# Altium PCB BMSPowerDistribution.PcbDoc (part 2 of 6)
Units mil, origin at the board's own origin, x right, y up, seen from the top; angles counter-clockwise.
Board outline 5328.74 x 5315 mil, 4 copper layers (Top Layer, Layer 1, Layer 2, Bottom Layer), stack 24.6 mil thick; 321 components, 209 nets, 1075 pads, 489 vias.
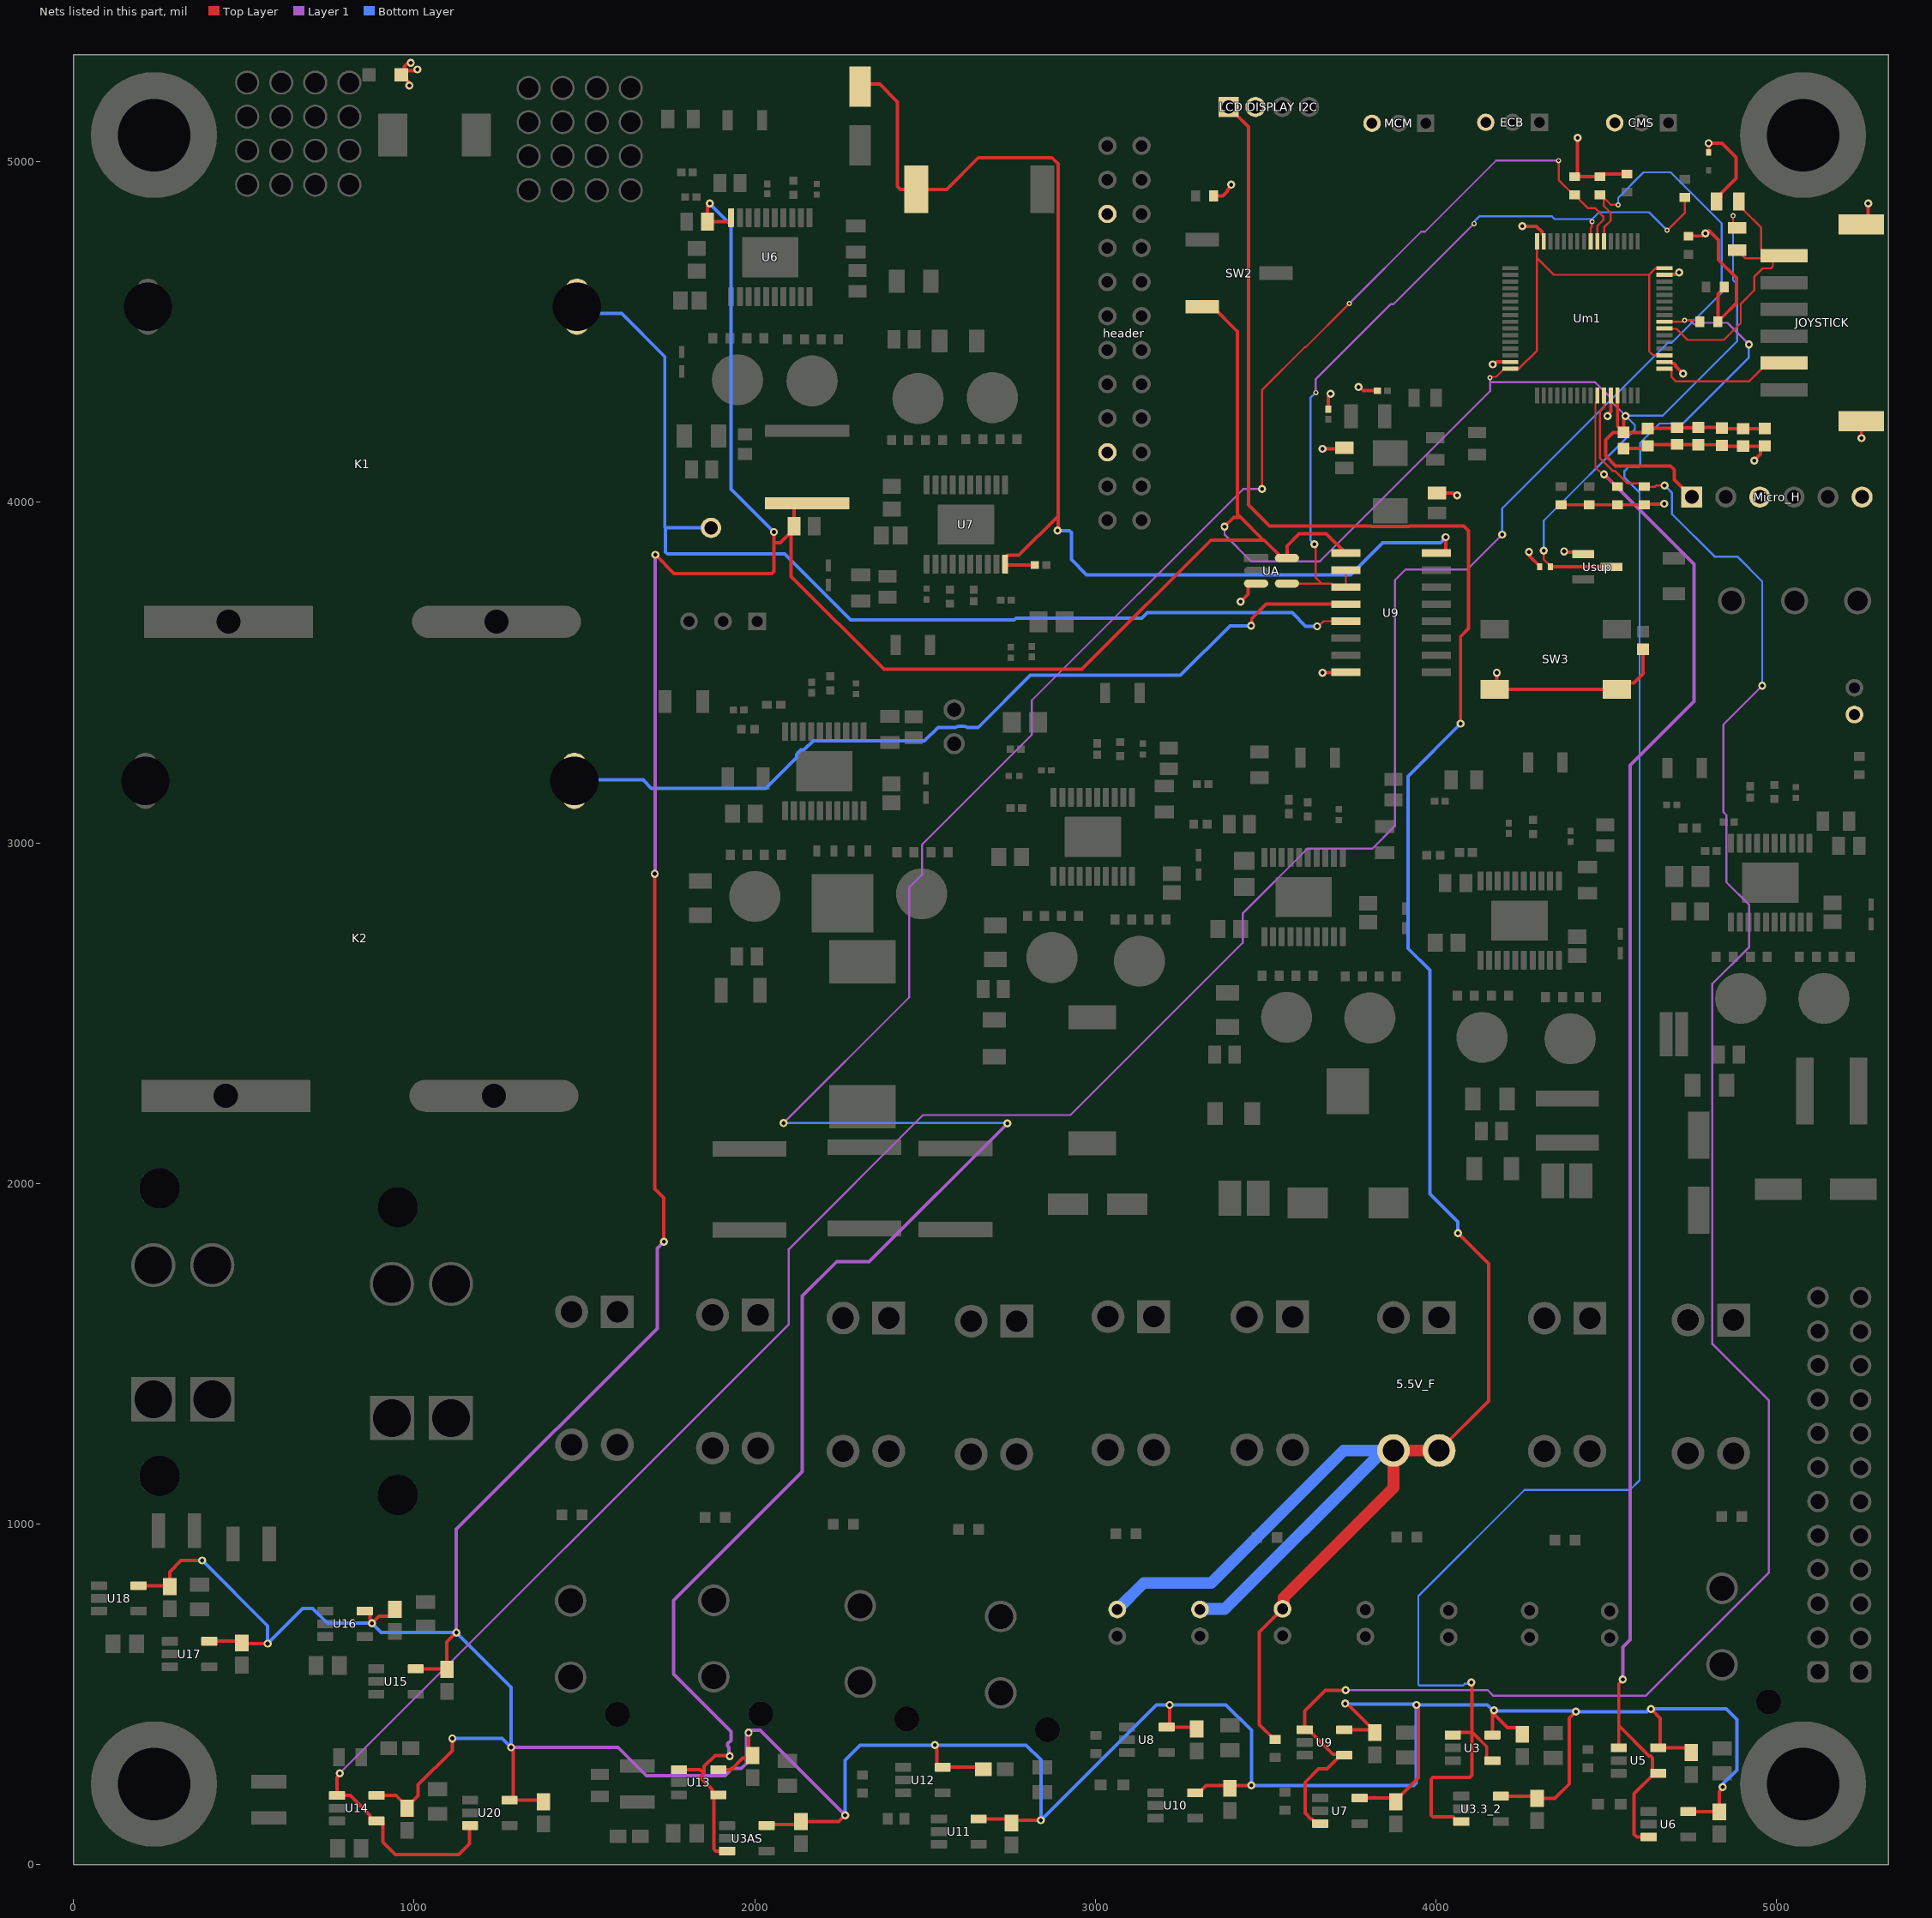
[diagram p4: the nets of this part, all layers, seen from the top]

## Part data (continued)
C17: library part CMP-1037-03888-2, "C1206 33,000 pF C0G 5.00% 100 V", Capacitance="33,000 pF", Manufacturer=KEMET, Package=C1206C-EB, Temperature="-55°C to +150°C", Temperature Characteristic=C0G, Temperature Coefficient=15%, Temperature Range High=+150°C, Temperature Range Low=-55°C, Tolerance=0.05, Voltage Rating="100 V", Automotive=Yes, Automotive Grade="Grade 0", Category=Cap, ComponentLink2Description=Datasheet, ComponentLink2URL=https://content.kemet.com/datasheets/KEM_C1007_X8R_ULTRA_150C_SMD.pdf, Device Class L1="Passive Components", Device Class L2=Capacitors, Device Class L3="Ceramic Capacitors", Height=0.88mm, Ipc Land Pattern Name=CAPC320160X78, Lead Free=Yes, Manufacturer Part Number=C1206C333J1GACTU, Material=Ceramic, Mouser Description="Cap Ceramic 0.033uF 100V C0G 5% Pad SMD 1206 125C T/R", Octopart=https://octopart.com/c1206c333j1gactu-kemet-47053096, RoHS=TRUE
C18 C21 C31 C67 C71 C75 C84 Cv Cv7: "No Description Available", Mfr_Name="Taiyo Yuden"
C19 C27 C66 Cc7: library part CMP-2008-04115-1, Manufacturer=Murata, Part Number=GRM1555C1E5R1CA01D
C20 C30 C68 C76 C85 Cb Cb71: library part CMP-2007-04739-1, Manufacturer="AVX Interconnect / Elco", Part Number=08053C104K4T2A
C22 C23 C24: library part CMP-08246-000988-1, "Cap Ceramic 47uF 16V X7R 20% Pad SMD 2220 +125°C Automotive T/R", Capacitance=47uF, Case Code (Imperial)=2220, Case Code (Metric)=5750, Dielectric=X7R, Max Operating Temperature=125°C, Min Operating Temperature=-55°C, Package Quantity=1, Ratings=AEC-Q200, Tolerance=20%, Voltage Rating=16V, Case/Package=2220, Composition=Ceramic, Depth=5mm, Height=2.3mm, Lead Free="Lead Free", Length=5.7mm, Mount="Surface Mount", Packaging="Tape and Reel", REACH SVHC="No SVHC", Termination=SMD/SMT, Thickness=0.091inch, Voltage Rating (DC)=16V, Weight=0.016932oz, Width=5mm
C25 C63 C74 Cc_6 Cr7: library part CMP-14477-003725-2, "None", Capacitance=270pF, Case Code (Imperial)=0402, Case Code (Metric)=1005, Dielectric=C0G, Max Operating Temperature=125°C, Min Operating Temperature=-55°C, Package Quantity=10000, Temperature Coefficient=30ppm/°C, Tolerance=5%, Voltage Rating=50V, Case/Package=0402, Construction=Flat, Depth=0.5mm, Halogen Free="Halogen Free", Height=0.5mm, Lead Free="Lead Free", Length=1mm, Mount="Surface Mount", Number of Pins=2, Packaging="Tape and Reel", Radiation Hardening=No, REACH SVHC="No SVHC", RoHS Compliant=Yes, Series=M, Termination=SMD/SMT, Thickness=0.022inch, Voltage Rating (DC)=50V, Width=0.02inch
C26 C64 C72 C81 Cs Cs7: "No Description Available", Mfr_Name=TDK
C28 C65 C80 Cc72 Cr: library part CMP-06035-063004-1, "CAP CER 100PF 50V C0G/NP0 0402", Capacitance=100pF, Case Code (Imperial)=0402, Case Code (Metric)=1005, Dielectric=C0G, Max Operating Temperature=125°C, Min Operating Temperature=-55°C, Package Quantity=10000, Temperature Coefficient=30ppm/°C, Tolerance=1%, Voltage=50V, Case/Package=0402, Construction=Flat, Depth=0.5mm, Height=0.5mm, Lead Free="Lead Free", Length=1mm, Material=Ceramic, Mount="Surface Mount", Packaging="Tape and Reel", RoHS Compliant=Yes, Series=GRM, Termination=SMD/SMT, Thickness=0.022inch, Voltage Rating=50V, Voltage Rating (DC)=50V, Width=0.5mm
C29: library part CMP-2100-03641-2, "CAP CER 0.1UF 16V X7R 0402", Capacitance=0.10μF, Manufacturer=Murata, Package=GRM15, Temperature="-55°C to +125°C", Temperature Characteristic=X7R, Temperature Range High=+125°C, Temperature Range Low=-55°C, Tolerance=10%, Voltage Rating=16Vdc, Category=Cap, ComponentLink2Description=Datasheet, ComponentLink2URL=https://search.murata.co.jp/Ceramy/image/img/A01X/G101/ENG/GRM155R71H471KA01-01A.pdf, Device Class L1="Passive Components", Device Class L2=Capacitors, Device Class L3="Ceramic Capacitors", Digikey Description="CAP CER 0.1UF 16V X7R 0402", Height=0.55mm, Ipc Land Pattern Name=CAPC10050X219, Lead Free=yes, Manufacturer Part Number=GRM155R71C104KA88D, Material=Ceramic, Mouser Description="0402 0.1 uF 16V ±10 % Tolerance X7R SMT Multilayer Ceramic Capacitor", Octopart=https://octopart.com/grm155r71c104ka88d-murata-196880, RoHS=TRUE, Standoff Height=0mm
C32 C33: library part CMP-2007-00302-2, "CAP CER 18PF 50V C0G/NP0 0805", Capacitance="18 pF", Manufacturer=KEMET, Package=C0805C-DN, Temperature="-55°C to +125°C", Temperature Characteristic=C0G, Temperature Coefficient=30ppm/°C, Temperature Range High=+125°C, Temperature Range Low=-55°C, Tolerance=0.05, Voltage Rating="50 V", Automotive=No, Category=Cap, ComponentLink2Description=Datasheet, ComponentLink2URL=https://content.kemet.com/datasheets/KEM_C1003_C0G_SMD.pdf, Device Class L1="Passive Components", Device Class L2=Capacitors, Device Class L3="Ceramic Capacitors", Digikey Description="CAP CER 18PF 50V C0G/NP0 0805", Height=0.88mm, Ipc Land Pattern Name=CAPC200125X78, Lead Free=Yes, Manufacturer Part Number=C0805C180J5GACTU, Material=Ceramic, Mouser Description="Cap Ceramic 18pF 50V C0G 5% SMD 0805 125C Paper T/R", Octopart=https://octopart.com/c0805c180j5gactu-kemet-144810, RoHS=TRUE
C34 C35: library part CMP-2008-03820-2, "Multi-Layer Ceramic Capacitor 1.5pF C0G  ±0.1pF 0402 Paper T/R", Capacitance=1.5pF, Case Code (Imperial)=0402, Case Code (Metric)=1005, Dielectric=C0G, Max Operating Temperature=125°C, Min Operating Temperature=-55°C, Package Quantity=10000, Temperature Coefficient=30ppm/°C, Voltage=50V, Case/Package=0402, Construction=Flat, Depth=0.5mm, Height=0.5mm, Lead Free="Lead Free", Lead Pitch=0.3mm, Length=1mm, Mount="Surface Mount", Number of Pins=2, Packaging="Tape and Reel", Radiation Hardening=No, REACH SVHC="No SVHC", Series=GJM, Termination=SMD/SMT, Thickness=0.022inch, Voltage Rating=50V, Voltage Rating (DC)=50V, Width=0.5mm
C40 Ct7: library part CMP-05428-001123-1, "Conductive Polymer Aluminum Solid Capacitors (OS-CON) 27uF ±20% 25V", Capacitance=27uF, Case/Package=Radial, ESR (Equivalent Series Resistance)=40mR, Leakage Current=135uA, Max Operating Temperature=105°C, Min Operating Temperature=-55°C, Package Quantity=1500, Ripple Current=2.45A, Tolerance=20%, Voltage=25V, Diameter=5mm, Dissipation Factor=12%, Height=5.9mm, Height - Seated (Max)=0.236inch, Length=5.9mm, Life (Hours)=5000Hour, Mount="Surface Mount", Number of Pins=6, Packaging="Tape and Reel", Polarity=Polar, REACH SVHC="No SVHC", Ripple Current (AC)=2.45A, RoHS Compliant=Yes, Series="OS-CON™, SVPF", Termination=SMD/SMT, Voltage Rating=25V, Voltage Rating (DC)=25V
C41 C42: library part CMP-05428-000019-2, "Conductive Polymer Aluminum Solid Capacitors (OS-CON) 22uF ±20% 35V", Capacitance=22uF, Case/Package=Radial, ESR (Equivalent Series Resistance)=35mR, Leakage Current=154uA, Max Operating Temperature=105°C, Min Operating Temperature=-55°C, Package Quantity=1000, Ripple Current=2.6A, Tolerance=20%, Voltage=35V, Diameter=6.3mm, Dissipation Factor=12%, Height=5.9mm, Height - Seated (Max)=0.236inch, Length=5.9mm, Life (Hours)=5000Hour, Mount="Surface Mount", Number of Pins=6, Packaging="Tape and Reel", Polarity=Polar, REACH SVHC="No SVHC", Ripple Current (AC)=2.6A, RoHS Compliant=Yes, Series="OS-CON™, SVPF", Termination=SMD/SMT, Voltage Rating=35V, Voltage Rating (DC)=35V
C51: library part CMP-2006-03713-1, Manufacturer=Kemet, Part Number=C0603C105K3RACTU
C53: library part CMP-2006-02836-2, "Chip Multilayer Ceramic Capacitors for General Purpose, 0603, 2.2uF, X7R, 15%, 10%, 10V", Capacitance=2.2uF, Case Code (Imperial)=0603, Case Code (Metric)=1608, Dielectric=X7R, Max Operating Temperature=125°C, Min Operating Temperature=-55°C, Package Quantity=1, Tolerance=10%, Voltage=10V, Case/Package=0603, Depth=0.8mm, Height=0.8mm, Lead Free="Lead Free", Length=1.6mm, Material=Ceramic, Mount="Surface Mount", Number of Pins=2, Packaging="Cut Tape", REACH SVHC="No SVHC", Termination=SMD/SMT, Thickness=0.035inch, Voltage Rating=10V, Voltage Rating (DC)=10V, Weight=7.1E-05oz, Width=0.031inch
C73 Cc6: library part CMP-1036-00838-4, "CAP CER 10PF 16V 20% NP0 0805", Capacitance="10 pF", Manufacturer=KEMET, Package=C0805C-DN, Temperature="-55°C to +125°C", Temperature Characteristic=C0G, Temperature Coefficient=30ppm/°C, Temperature Range High=+125°C, Temperature Range Low=-55°C, Tolerance=0.2, Voltage Rating="16 V", Automotive=No, Category=Cap, ComponentLink2Description=Datasheet, ComponentLink2URL=https://content.kemet.com/datasheets/KEM_C1003_C0G_SMD.pdf, Device Class L1="Passive Components", Device Class L2=Capacitors, Device Class L3="Ceramic Capacitors", Digikey Description="CAP CER 10PF 16V 20% NP0 0805", Height=0.88mm, Ipc Land Pattern Name=CAPC200125X78, Lead Free=Yes, Manufacturer Part Number=C0805C100M4GACTU, Material=Ceramic, Mouser Description="Multilayer Ceramic Capacitors MLCC - SMD/SMT 16volts 10pF C0G 20%", Octopart=https://octopart.com/c0805c100m4gactu-kemet-16430157, RoHS=TRUE
C77 C86: library part CMP-2000-06362-2, "CAP CER 47UF 16V X5R 1210", Capacitance=47uF, Case Code (Imperial)=1210, Case Code (Metric)=3225, Dielectric=X5R, Max Operating Temperature=85°C, Min Operating Temperature=-55°C, Package Quantity=1, Tolerance=10%, Voltage=16V, Case/Package=1210, Depth=2.5mm, Height=2.5mm, Lead Free="Lead Free", Length=3.2mm, Material=Ceramic, Mount="Surface Mount", Number of Pins=2, Packaging="Cut Tape", Radiation Hardening=No, REACH SVHC="No SVHC", RoHS Compliant=Yes, Termination=SMD/SMT, Thickness=0.106inch, Voltage Rating=16V, Voltage Rating (DC)=16V, Width=0.098inch
C82: library part CMP-2008-03987-1, Manufacturer=Murata, Part Number=GRM1555C1E120JA01D
C83: library part CMP-2008-04006-2, "Chip Multilayer Ceramic Capacitors for General Purpose, 0402, 390pF, C0G, 30ppm/°C, 5%, 50V", Capacitance=390pF, Case Code (Imperial)=0402, Case Code (Metric)=1005, Dielectric=C0G, Max Operating Temperature=125°C, Min Operating Temperature=-55°C, Package Quantity=1, Tolerance=5%, Voltage=50V, Case/Package=0402, Depth=0.5mm, Height=0.5mm, Length=1mm, Mount="Surface Mount", Packaging="Tape and Reel", Radiation Hardening=No, Termination=SMD/SMT, Thickness=0.022inch, Voltage Rating=50V, Voltage Rating (DC)=50V, Width=0.02inch
Cb1 Cb2 Cb3 Cb4 Cb5 Cb6 Cb7 Cb8 Cb9 Cb11 Cb12 Cb13 Cb14 Cb16 Cb17 Cb18 Cb19 Cbp Cbp2 Cbx: library part CMP-06035-047895-1, "Cap Ceramic 0.1uF 100V X7R 10% Pad SMD 0603 Soft Termination +125°C Automotive T/R", Capacitance=100nF, Case Code (Imperial)=0603, Case Code (Metric)=1608, Max Operating Temperature=125°C, Min Operating Temperature=-55°C, Ratings=AEC-Q200, Tolerance=10%, Voltage Rating=100V, Case/Package=0603, Features="Soft Termination", Lead Free="Lead Free", Length=0.063inch, Mount="Surface Mount", Packaging="Tape and Reel", Thickness=0.035inch, Width=0.031inch
CMS ECB MCM: library part CMP-2000-05164-1, "Male Header, Pitch 2 mm, 1 x 3 Position, Height 6 mm, Tail Length 3.4 mm, -25 to 85 degC, RoHS, Bulk", Manufacturer=JST, Datasheet URL=https://datasheet.ciiva.com/11746/0900766b80826550-11746939.pdf, Datasheet Version=Oct-06, Manufacturer URL=http://www.jst.com/home2.html, No of Positions=3, Pitch=2mm, Style/Orientation=StraightHeader/Plug, Termination=Crimp, Type=ShroudedHeader
Co_6: library part CMP-2007-01007-2, "CAP CER 4.7UF 10V X5R 0805", Capacitance=4.7uF, Case Code (Imperial)=0805, Case Code (Metric)=2012, Dielectric=X5R, Dielectric Material=Ceramic, Max Operating Temperature=85°C, Min Operating Temperature=-55°C, Package Quantity=1, Tolerance=10%, Voltage=10V, Case/Package=0805, Construction=Flat, Depth=1.25mm, Dissipation Factor=5%, Height=1.25mm, Lead Free="Lead Free", Lead Pitch=0.75mm, Length=2mm, Mount="Surface Mount", Number of Pins=2, Packaging="Tape and Reel", Radiation Hardening=No, REACH SVHC="No SVHC", RoHS Compliant=Yes, Series=C, Termination=SMD/SMT, Thickness=0.055inch, Voltage Rating=10V, Voltage Rating (DC)=10V, Width=1.2mm
CR15: "No Description Available", Mfr_Name="Diodes Inc"
D1 D2 D3 D4 D5 D6 D7: "No Description Available", Mfr_Name=Nexperia
D11: library part CMP-1051-00018-1, "Schottky Barrier Diode, 2-Pin SOD-523, Pb-Free, Tape and Reel", Manufacturer="On Semiconductor", ComponentLink1Description="Manufacturer URL", ComponentLink1URL=http://www.onsemi.com/, ComponentLink2Description=Datasheet, ComponentLink2URL=http://www.onsemi.cn/pub_link/Collateral/RB521S30T1-D.PDF, ComponentLink3Description="Package Specification", ComponentLink3URL=http://www.onsemi.com/pub_link/Collateral/502-01.PDF, Configuration=Single, DatasheetVersion="Rev. 8", IFSM Max (A)=1, Mounting Technology="Surface Mount", PackageDescription="2-Pin SOD, Body 1.2 x 0.8 mm", PackageReference=SOD-523-2-502-01, PackageVersion="Rev. E, 09/2010", Packing="Tape and Reel", PartNumber=RB521S30T1G, RoHS=TRUE
header J2: "No Description Available", Mfr_Name=Sullins, RefDes=RefDes, Type=Type
JOYSTICK: library part CMP-2000-07027-1, "Male Header, Pitch 2 mm, 1 x 6 Position, Height 5.5 mm, -25 to 85 degC", Manufacturer=JST, Package Description="Male Header, Pitch 2 mm, 1 x 6 Position, Height 5.5 mm", Datasheet URL=https://datasheet.ciiva.com/11747/0900766b80df0d9d-11747278.pdf, Datasheet Version=11/2008, Manufacturer URL=http://www.jst.com/home2.html, Mounting Technology=SurfaceMount, No of Positions=6, Package Reference=S6B-PH-SM4-TB(LF)(SN), Pitch=2mm, Style/Orientation=RightAngleHeader/Plug, Termination=Solder, Type=ShroudedHeader
JR: "No Description Available", Mfr_Name="Samtec Inc", RefDes=RefDes, Type=Type
K1 K2: library part CMP-00287-65278423-1, "HE1AN-W-DC12V-Y6 HE Series SPST 12 V 90 A PV Type Solar Inverter General Purpose Power Relay", Coil Current=160mA, Coil Power=1.92W, Coil Resistance=75Ω, Coil Voltage (DC)=12V, Contact Current Rating=90A, Max Operating Temperature=55°C, Min Operating Temperature=-50°C, Coil Type=Non-Latching, Contact Material=Silver, Current Rating=90A, Lead Free="Lead Free", Mount="PCB, Through Hole", NexarPartId=65278423, Number of Pins=4, Operate Time=30ms, Packaging=Bulk, Relay Type="General Purpose", Release Time=10ms, RoHS=Compliant, Termination="PC Pin", Throw Configuration=SPST
L1: "No Description Available", Mfr_Name=Vishay
L1_2 L1_3 L1_4 L1_7: "No Description Available", Mfr_Name=Coilcraft
L1_5: library part CMP-11268-000050-1, "Fixed Inductors 2.2uH 20% 9.7A 14.5mOhms", DC Resistance (DCR)=14.5mR, Inductance=2.2uH, Max DC Current=9.2A, Max Operating Temperature=125°C, Min Operating Temperature=-40°C, Package Quantity=20, Self Resonant Frequency=38MHz, Test Frequency=100kHz, Tolerance=20%, Core Material=Composite, Height=3.1mm, Lead Free="Contains Lead", Length=5.68mm, Packaging="Tape and Reel", Shielding=Shielded, Termination=SMD/SMT, Width=5.48mm
L6: library part CMP-0227-00379-3, Ambient Temperature Range High=95°C, Ambient Temperature Range Low=-40°C, Current Rating=1.05A, DC Resistance (DCR)=135mΩ, Inductance=27µH, Inductance Tolerance=30%, Max Operating Temperature=125°C, Self Resonant Frequency=15MHz, Height=2.8mm, Length=5.8mm, Min Operating Temperature=-40°C, NexarPartId=22803252, Number of Pins=2, Packaging="Cut Tape (CT)", RoHS=Compliant, Width=5.8mm
"LCD DISPLAY I2C": library part CMP-2000-05165-1, "Male Header, Pitch 2 mm, 1 x 4 Position, Height 6 mm, Tail Length 3.4 mm, -25 to 85 degC, RoHS, Bulk", Manufacturer=JST, Datasheet URL=http://datasheet.octopart.com/B4B-PH-K-S%28LF%29%28SN%29-JST-datasheet-10558886.pdf, Datasheet Version=Apr-09, Manufacturer URL=http://www.jst.com/home2.html, No of Positions=4, Pitch=2mm, Style/Orientation=StraightHeader/Plug, Termination=Crimp, Type=ShroudedHeader
M1 M1_2 M1_3 M1_4 M1_7 M2_7 Q3 Q5 Q6_1: library part CMP-04962-000050-1, "MOSFET N-CH 60V 50A 8SON", Continuous Drain Current (ID)=62A, Drain to Source Breakdown Voltage=60V, Drain to Source Resistance=13mR, Gate to Source Voltage (Vgs)=20V, Input Capacitance=1.48nF, Max Operating Temperature=150°C, Max Power Dissipation=3.2W, Min Operating Temperature=-55°C, Package Quantity=2500, Contact Plating=Copper, Drain to Source Voltage (Vdss)=60V, Element Configuration=Single, Fall Time=3.2ns, Lead Free="Contains Lead", Mount="Surface Mount", Nominal Vgs=3V, Number of Elements=1, Number of Pins=8, Packaging="Tape and Reel", Power Dissipation=3.2W, Radiation Hardening=No, Rds On Max=13mR, REACH SVHC="No SVHC", Rise Time=4ns, RoHS Compliant=Yes, Turn-Off Delay Time=14.4ns, Turn-On Delay Time=5.8ns
M2 U9 Usup: "No Description Available", Mfr_Name="Texas Instruments", RefDes=RefDes
  M2: Type=TYPE
  U9 Usup: Type=Type
Micro_H: library part CMP-04776-000763-1, "CONN HEADER VERT 6POS 2.54MM", Color=Black, Contact Resistance=20mR, Current Rating=4A, Max Operating Temperature=75°C, Max Voltage Rating (AC)=250V, Max Voltage Rating (DC)=250.25kV, Min Operating Temperature=0°C, Package Quantity=1, Connector Type="Male Pin", Contact Material=Brass, Contact Mating Length=0.24inch, Contact Plating=Tin, Contact Type="Male Pin", Depth=2.49mm, Gender=Male, Housing Color=Black, Housing Material=Thermoplastic, Length=15.24mm, Mount="Through Hole", Number of Contacts=6, Number of Positions=6, Number of Rows=1, Orientation=Straight, Packaging=Bulk, Pitch=2.54mm, RoHS Compliant=Yes, Series="KK® 42375", Termination=Solder, Voltage Rating=250V
MP1 MP2 MP3 MP4: library part CMP-03913-89311597-1, "9774050482R WA-SMSI SMT Steel Spacer, M4 Internal non Stop", Max Operating Temperature=150°C, Min Operating Temperature=-55°C, Length=5mm, Material=Steel, NexarPartId=89311597, Packaging="Tape and Reel", RoHS=Compliant, Width=8.2mm
MP7 MP8: library part CMP-69313-000006-1, "HEATSINK 14-DIP/16-DIP", Color=Black, Natural Thermal Resistance=67°C/W, Package Quantity=2000, Thermal Resistance @ Forced Air Flow (100 LFM)=30°C/W, Depth=19.05mm, Finish=Anodized, Height=4.826mm, Height Off Base=0.19inch, Lead Free="Lead Free", Length=0.75inch, Material=Aluminium, Mount=Adhesive, Number of Pins=14, Packaging=Bulk, REACH SVHC="No SVHC", RoHS Compliant=Yes, Shape=Fins, Type=Passive, Width=0.25inch
MP+ MP-: "7461147 REDCUBE Power Element Poles, 180A, Press-Fit, M5 Internal Thread, Vertical, WP-BUFU", Current Rating=180A, Max Operating Temperature=150°C, Min Operating Temperature=-55°C, Supplier Part Number 1=732-3215-ND, Contact Material=Copper, Contact Plating=Tin, Height=10.5mm, Insulation=Non-Insulated, Length=9mm, Material=Brass, Mount="Through Hole", NexarPartId=18187424, Number of Contacts=16, Number of Pins=16, Packaging=Bulk, REACH SVHC=Unknown, RoHS=Compliant, Supplier 1=Digikey, Termination=Press-Fit, Thread Size=M5, Width=9mm
"ON/OFF SW": "No Description Available", Mfr_Name=E-Switch, RefDes=RefDes, Type="Toggle Switches"
Q1 Q2 Q4 Q6 Q6_2: library part CMP-04962-000014-1, "MOSFET N-CH 60V 8SON", Continuous Drain Current=13A, Drain to Source Breakdown Voltage=60V, Drain to Source Resistance=7.8mΩ, Gate To Source Voltage=20V, Input Capacitace At Vds="1360pF @ 30V", Manufacturer="Texas Instruments", Max Forward Diode Voltage=1V, Max Junction Temp=+150°C, Package=DQJ0008A, Power Dissipation=3.1W, Pulse Drain Current=229A, Temperature="-55°C to +150°C", Temperature Range Low=-55°C, Typ Forward Diode Voltage=0.8V, Automotive=No, Category=Trans, ComponentLink2Description=Datasheet, ComponentLink2URL=http://www.ti.com/lit/ds/symlink/csd18534q5a.pdf, Depletion Mode=False, Device Class L1="Discrete Semiconductors", Device Class L2=Transistors, Device Class L3=MOSFETs, Digikey Description="MOSFET N-CH 60V 8SON", Drain To Source Voltage=60V, Gate Charge At Vgs="17nC @ 10V", Height=1.1mm, Lead Free=Yes, Manufacturer Part Number=CSD18534Q5A, Mouser Description="MOSFET 60V N-Ch NexFET Pwr MOSFET", Number Of Channels=1, Number Of N Channels=1, Octopart=https://octopart.com/csd18534q5a-texas+instruments-22791040, Reverse Recovery Charge=54nC, Reverse Recovery Time=40ns, RoHS=TRUE, Rthja Max=50°C/W, Temperature Range High=+150°C, Threshold Vgs Max=2.3V, Threshold Vgs Min=1.5V, Transconductance=72S, Turn Off Delay Time=15ns, Turn On Delay Time=5.2ns
R1 R16 R26 R46 R60 Re7 Ren: library part CMP-2002-08314-2, "RES Thick Film, 1MΩ, 1%, 0.063W, 100ppm/°C, 0402", Case Code (Imperial)=0402, Case Code (Metric)=1005, Max Operating Temperature=155°C, Max Power Dissipation=63mW, Min Operating Temperature=-55°C, Package Quantity=10, Resistance=1MR, Temperature Coefficient=100ppm/°C, Tolerance=1%, Voltage Rating=50V, Case/Package=0402, Composition="Thick Film", Contact Plating=Tin, Depth=0.5mm, Features="Automotive AEC-Q200", Height=0.35mm, Lead Free="Lead Free", Length=1mm, Military Standard=Not, Number of Pins=2, Number of Terminations=2, Packaging="Tape and Reel", Power Rating=63mW, Radiation Hardening=No, Termination=SMD/SMT, Voltage Rating (DC)=50V, Weight=2.3E-05oz, Width=0.02inch
R2 R12 R22 R42 R53 RU1 Ru7: library part CMP-2001-03906-2, Case Code (Imperial)=0805, Case Code (Metric)=2012, Manufacturer Package Identifier=CRCW0805-e3, Max Operating Temperature=155°C, Max Power Dissipation=125mW, Min Operating Temperature=-55°C, Resistance=41.2kΩ, Temperature Coefficient=100ppm/°C, Tolerance=1%, Voltage Rating=150V, Case/Package=0805, Composition="Thick Film", Contact Plating=Tin, Depth=1.25mm, Features="Automotive AEC-Q200", Height=500µm, Lead Free="Lead Free", Length=2mm, Military Standard=Not, NexarPartId=39846735, Number of Pins=2, Number of Terminations=2, Packaging="Cut Tape", Power Rating=125mW, Radiation Hardening=No, REACH SVHC=Unknown, RoHS=Compliant, Schedule B="8533210045, 8533210045", Termination=SMD/SMT, Voltage Rating (DC)=150V, Weight=5.499807mg, Width=1.2446mm
R3 R13 R23 R43 R54 RU2 Ruv7: library part CMP-2001-00072-1, Manufacturer=Panasonic, Part Number=ERJ-6ENF2491V
R4 R14 R24 R44 R55 Rt Rt7: library part CMP-2002-00118-4, "RES Thick Film, 5.23kΩ, 1%, 0.063W, 100ppm/°C, 0402", Case Code (Imperial)=0402, Case Code (Metric)=1005, Max Operating Temperature=155°C, Max Power Dissipation=63mW, Min Operating Temperature=-55°C, Package Quantity=10, Resistance=5.23kR, Temperature Coefficient=100ppm/°C, Tolerance=1%, Voltage Rating=50V, Case/Package=0402, Composition="Thick Film", Contact Plating=Tin, Depth=0.5mm, Features="Automotive AEC-Q200", Height=0.35mm, Lead Free="Lead Free", Length=1mm, Military Standard=Not, Number of Pins=2, Number of Terminations=2, Packaging="Tape and Reel", Power Rating=63mW, Radiation Hardening=No, Termination=SMD/SMT, Voltage Rating (DC)=50V, Weight=2.3E-05oz, Width=0.5mm, Working Voltage=50V
R5: library part CMP-1011-00737-2, Manufacturer="Vishay Dale", Part Number=CRCW0402102KFKED
R6 R49 R59 Rfb: "No Description Available", Mfr_Name="Stackpole International"
R7: library part CMP-2003-02282-2, "RES Thick Film, 56kΩ, 1%, 0.25W, 100ppm/°C, 1206", Case Code (Imperial)=1206, Case Code (Metric)=3216, Max Operating Temperature=155°C, Max Power Dissipation=250mW, Min Operating Temperature=-55°C, Package Quantity=10, Resistance=56kR, Temperature Coefficient=100ppm/°C, Tolerance=1%, Voltage Rating=200V, Case/Package=1206, Composition="Thick Film", Contact Plating=Tin, Depth=1.6mm, Features="Automotive AEC-Q200", Height=0.55mm, Lead Free="Lead Free", Length=3.2mm, Military Standard=Not, Number of Pins=2, Number of Terminations=2, Packaging="Tape and Reel", Power Rating=250mW, Radiation Hardening=No, Termination=SMD/SMT, Voltage Rating (DC)=200V, Weight=0.000353oz, Width=0.063inch
R8: "No Description Available", Mfr_Name="Bourns Electronics"
R9 R10 R20 R30 R31 R32 R33 R34 R35 R36 R37 R38 R40 R50 R52 RSW: library part CMP-2100-03664-2, "RES 10K OHM 1% 1/10W 0603", Case Code (Imperial)=0603, Case Code (Metric)=1608, Max Operating Temperature=155°C, Max Power Dissipation=100mW, Min Operating Temperature=-55°C, Resistance=10kR, Resistance Tolerance=1%, Resistor Type="Thick Film", Temperature Coefficient=100ppm/°C, Voltage Rating=75V, Voltage Rating (DC)=50V, Case/Package=0603, Construction=Rectangular, Depth=0.8mm, Features="Moisture Resistant", Height=0.45mm, Lead Free="Lead Free", Lead Pitch=0.3mm, Length=1.6mm, Military Standard=Not, Number of Pins=2, Number of Terminations=2, Packaging="Tape and Reel", Power Rating=100mW, RoHS Compliant=Yes, Series=RC, Size Code=0603, Termination=SMD/SMT, Tolerance=1%, Weight=7.1E-05oz, Width=0.8mm
R11: library part CMP-1012-00590-3, "RES Thick Film, 5.1kΩ, 1%, 0.1W, 100ppm/°C, 0603", Case Code (Imperial)=0603, Case Code (Metric)=1608, Max Operating Temperature=155°C, Min Operating Temperature=-55°C, Package Quantity=5000, Power Rating=100mW, Resistance=5.1kR, Temperature Coefficient=100ppm/°C, Tolerance=1%, Voltage Rating=75V, Case/Package=0603, Composition="Thick Film", Contact Plating=Tin, Depth=0.85mm, Height=0.45mm, Lead Free="Lead Free", Length=1.55mm, Military Standard=Not, Mount="Surface Mount", Packaging="Tape and Reel", Radiation Hardening=No, Termination=SMD/SMT, Voltage Rating (DC)=75V, Weight=7.1E-05oz, Width=0.85mm
R15 Rc7: library part CMP-2002-08268-4, "RES Thick Film, 191kΩ, 1%, 0.063W, 100ppm/°C, 0402", Case Code (Imperial)=0402, Case Code (Metric)=1005, Max Operating Temperature=155°C, Max Power Dissipation=63mW, Min Operating Temperature=-55°C, Package Quantity=10, Resistance=191kR, Temperature Coefficient=100ppm/°C, Tolerance=1%, Voltage Rating=50V, Case/Package=0402, Composition="Thick Film", Contact Plating=Tin, Depth=0.5mm, Features="Automotive AEC-Q200", Height=0.016inch, Lead Free="Lead Free", Length=1mm, Military Standard=Not, Number of Pins=2, Number of Terminations=2, Packaging="Tape and Reel", Power Rating=63mW, Radiation Hardening=No, Termination=SMD/SMT, Voltage Rating (DC)=50V, Weight=2.3E-05oz, Width=0.5mm
R17 Rs7: library part CMP-26527-006578-1, "General Purpose Thick Film Chip Resistor, 1206, 15mΩ, 1%, 0.5W", Case Code (Imperial)=1206, Case Code (Metric)=3216, Max Operating Temperature=155°C, Max Power Dissipation=500mW, Min Operating Temperature=-55°C, Resistance=15mR, Resistor Type="Thick Film", Temperature Coefficient=100ppm/°C, Tolerance=1%, Case/Package=1206, Contact Plating=Tin, Height=0.026inch, Lead Free="Lead Free", Length=0.12inch, Mount="Surface Mount", Number of Terminations=2, Packaging="Tape and Reel", Radiation Hardening=No, RoHS Compliant=Yes, Series=CSR, Width=0.061inch
R18 R28 Rf7: library part CMP-03412-015018-2, "RES 86.6kΩ ±1% 0.063W 0402", Case Code (Imperial)=0402, Case Code (Metric)=1005, Max Operating Temperature=155°C, Max Power Dissipation=63mW, Min Operating Temperature=-55°C, Power Rating=62.5mW, Resistance=86.6kR, Resistor Type="Thick Film", Temperature Coefficient=100ppm/°C, Tolerance=1%, Voltage Rating=50V, Case/Package=0402, Features="Moisture Resistant", Height=0.015inch, Length=0.039inch, Number of Terminations=2, Packaging="Tape and Reel", RoHS Compliant=Yes, Series=AC, Termination=SMD/SMT, Weight=2.3E-05oz, Width=0.5mm
R19 R29 Rb7: library part CMP-1013-00622-2, Manufacturer=Panasonic, Part Number=ERJ-6ENF9761V
R21 R41: library part CMP-1012-00567-3, Case Code (Imperial)=0603, Max Operating Temperature=155°C, Max Power Dissipation=100mW, Min Operating Temperature=-55°C, Resistance=3.3kΩ, Temperature Coefficient=100ppm/°C, Tolerance=1%, Voltage Rating=50V, Case Code (Metric)=0603, Case/Package=0603, Composition="Thick Film", Depth=800µm, Features="Moisture Resistant", Height=450µm, Lead Free="Lead Free", Length=1.6mm, Military Standard=Not, Mount="Surface Mount", NexarPartId=40011875, Number of Pins=2, Number of Terminations=2, Packaging="Tape & Reel", Power Rating=100mW, REACH SVHC="No SVHC", RoHS=Compliant, Schedule B="8533210045, 8533210045", Termination=SMD/SMT, Voltage Rating (AC)=50V, Voltage Rating (DC)=50V, Width=800µm
R25: library part CMP-2002-08203-2, "RES Thick Film, 143kΩ, 1%, 0.063W, 100ppm/°C, 0402", Case Code (Imperial)=0402, Case Code (Metric)=1005, Max Operating Temperature=155°C, Min Operating Temperature=-55°C, Package Quantity=10000, Power Rating=63mW, Resistance=143kR, Temperature Coefficient=100ppm/°C, Tolerance=1%, Voltage Rating=50V, Case/Package=0402, Composition="Thick Film", Contact Plating=Tin, Depth=0.5mm, Height=0.35mm, Lead Free="Lead Free", Length=1mm, Military Standard=Not, Number of Pins=2, Packaging="Tape and Reel", Radiation Hardening=No, Termination=SMD/SMT, Voltage Rating (DC)=50V, Weight=2.3E-05oz, Width=0.5mm
R27: library part CMP-2003-04760-2, "7 mOhms ±1% 1W Chip Resistor Wide 0612 (1632 Metric), Current Sense Thin Film", Case Code (Imperial)=1206, Case Code (Metric)=3216, Max Operating Temperature=125°C, Max Power Dissipation=1W, Min Operating Temperature=-55°C, Package Quantity=1, Resistance=7mR, Resistor Type="Thin Film", Temperature Coefficient=350ppm/°C, Tolerance=1%, Case/Package=1206, Height=0.024inch, Lead Free="Lead Free", Length=0.063inch, Number of Terminations=2, Packaging="Tape and Reel", Power Rating=1W, RoHS Compliant=Yes, Series=PRL, Technology="THIN FILM", Termination=SMD/SMT, Width=0.126inch
R45: library part CMP-2002-00162-1, Manufacturer="Vishay Dale", Part Number=CRCW040266K5FKED
R47 R57: library part CMP-26527-002803-1, "General Purpose Thick Film Chip Resistor, 1206, 12mΩ, 1%, 0.5W", Case Code (Imperial)=1206, Case Code (Metric)=3216, Max Operating Temperature=155°C, Max Power Dissipation=500mW, Min Operating Temperature=-55°C, Resistance=12mR, Resistor Type="Thick Film", Temperature Coefficient=100ppm/°C, Tolerance=1%, Case/Package=1206, Construction=Rectangular, Contact Plating=Tin, Depth=1.55mm, Height=0.026inch, Lead Free="Lead Free", Length=0.12inch, Military Standard=Not, Mount="Surface Mount", Number of Terminations=2, Packaging="Tape and Reel", RoHS Compliant=Yes, Series=CSR, Width=0.061inch
R48: library part CMP-2001-00129-1, Manufacturer=Panasonic, Part Number=ERJ-6ENF3242V
R51: library part CMP-2000-06932-2, "RES 20K OHM 1% 1/10W 0603", Case Code (Imperial)=0603, Case Code (Metric)=1608, Max Operating Temperature=155°C, Max Power Dissipation=100mW, Min Operating Temperature=-55°C, Package Quantity=1, Resistance=20kR, Resistance Tolerance=1%, Resistor Type="Thick Film", Temperature Coefficient=100ppm/°C, Voltage Rating=50V, Case/Package=0603, Construction=Rectangular, Depth=0.8mm, Features="Moisture Resistant", Height=0.022inch, Lead Free="Lead Free", Length=0.063inch, Military Standard=Not, Number of Pins=2, Number of Terminations=2, Packaging="Tape and Reel", Power Rating=100mW, REACH SVHC="No SVHC", RoHS Compliant=Yes, Series=RC, Size Code=0603, Technology="THICK FILM", Termination=SMD/SMT, Tolerance=1%, Voltage Rating (DC)=50V, Width=0.031inch
R56: library part CMP-2002-00027-1, Manufacturer="Vishay Dale", Part Number=CRCW040247K5FKED
R58 Rf: library part CMP-2001-00015-1, Manufacturer=Panasonic, Part Number=ERJ-6ENF1872V
RAS RAS3 RM RM3: library part CMP-2005-01988-2, "RES SMD 205K OHM 1% 1/2W 1770", Case Code (Imperial)=1210, Case Code (Metric)=3225, Max Operating Temperature=155°C, Max Power Dissipation=500mW, Min Operating Temperature=-55°C, Package Quantity=1, Resistance=100kR, Temperature Coefficient=100ppm/°C, Tolerance=1%, Voltage Rating=200V, Case/Package=1210, Composition="Thick Film", Contact Plating=Tin, Depth=2.5mm, Features="Automotive AEC-Q200", Height=0.024inch, Lead Free="Lead Free", Length=3.2mm, Military Standard=Not, Mount="Surface Mount", Number of Pins=2, Number of Terminations=2, Packaging="Tape and Reel", Power Rating=500mW, Radiation Hardening=No, Termination=SMD/SMT, Voltage Rating (DC)=200V, Weight=0.000564oz, Width=2.5mm
RAS2 RAS4 RM2 RM4: library part CMP-2001-04472-1, Manufacturer="Vishay Dale", Part Number=CRCW080510K0FKEAHP
Rc: library part CMP-2002-07773-1, Manufacturer="Yageo / Phycomp", Part Number=RC0402FR-0768K1L
RJ1 RJ2 RJ3 RJ4 RJ5 RJ6 RJ7: library part CMP-2001-04896-1, Manufacturer="Vishay Dale", Part Number=CRCW08050000Z0EA
RL: library part CMP-2003-04857-2, "RES Thick Film, 0Ω, 0.25W, 1206", Case Code (Imperial)=1206, Case Code (Metric)=3216, Max Operating Temperature=155°C, Min Operating Temperature=-55°C, Package Quantity=5000, Power Rating=250mW, Resistance=0mR, Temperature Coefficient=100ppm/°C, Tolerance=1%, Voltage Rating=200V, Case/Package=1206, Composition="Thick Film", Contact Plating=Tin, Depth=1.6mm, Height=0.55mm, Lead Free="Lead Free", Length=3.2mm, Military Standard=Not, Mount="Surface Mount", Packaging="Tape and Reel", Radiation Hardening=No, Termination=SMD/SMT, Voltage Rating (DC)=200V, Weight=0.000353oz, Width=1.6mm
RL1 RL2 RL3 RL4 RL5 RL6 RL7 RL8 RL9: library part CMP-2001-04104-1, Manufacturer="Vishay Dale", Part Number=CRCW0805750RFKEA
Rs: library part CMP-2000-00864-1, Manufacturer=Panasonic, Part Number=ERJ-3RSFR15V
SW2: library part CMP-10038-000023-1, "SWITCH SLIDE SPDT 300MA 6V", Actuator Color=Black, Case/Package=SMD/SMT, Contact Resistance=70mR, Current Rating=300mA, Max Operating Temperature=85°C, Max Voltage Rating (DC)=30V, Min Operating Temperature=-40°C, Package Quantity=4000, Voltage Rating (DC)=6V, Actuator Length=2mm, Actuator Material=Nylon, Actuator Type=Standard, Contact Material="Copper Alloy", Contact Plating=Silver, Depth=7.5mm, Electrical Life=5000Cycles, Housing Material=Nylon, Length=8.5mm, Max Current Rating=300mA, Mount="Surface Mount", Orientation=Straight, Packaging="Tape and Reel", Radiation Hardening=No, RoHS Compliant=Yes, Series=JS, Switch Function=On-On, Switch Travel=2mm, Termination="Gull Wing", Throw Configuration=SPDT
SW3: library part CMP-2000-05602-2, "Swicth, SPST, 24 V, -35 to 85 degC, 4-Pin SMD, RoHS, Tape and Reel", Case\/Package=SMD/SMT, Contact Current Rating=50mA, Contact Resistance=100mOhm, Manufacturer="TE Connectivity", Max Operating Temperature=85degC, Max Voltage Rating (DC)=12V, Min Operating Temperature=-35degC, Operating Force=1.57N, Package Description="4-Pin Surface Mount Device, Body 6 x 6 mm, Pitch 4.5 mm", Package Quantity=750, Voltage Rating=24V, Actuator Length=0.055inch, Actuator Material=Polyamide, Contact Material=CopperAlloy, Contact Plating=Silver, Current Rating=50mA, Datasheet URL=http://www.te.com/commerce/DocumentDelivery/DDEController?Action=showdoc&DocId=Customer+Drawing%7F2-1437565-7%7FV%7Fpdf%7FEnglish%7FENG_CD_2-1437565-7_V.pdf%7F4-1437565-2, Datasheet Version="Rev. V, 02/2015", Electrical Life=100000Cycles, Illumination Type=Illuminated, Length=6mm, Manufacturer URL=http://www.te.com/, Mechanical Life=100000Cycles, Mount=SurfaceMount, Mounting Technology=SurfaceMount, Orientation=Straight, Package Reference=FSM4JSMA, Packaging=LoosePiece, REACH SVHC=Unknown, RoHSCompliant=true, Switch Travel=0.25mm, Termination=GullWing, Throw Configuration=SPST, Voltage Rating (DC)=24V, Width=6mm
U1 U2 U3 U4 U5 U6 U7: library part CMP-0069-01417-3, "Wide Range Synchronous Buck Controller, 20-pin TSSOP-EP, Pb-Free", Manufacturer="Texas Instruments", PackageTopMarking=NSUZXYTT*LM25116*MH, PowerWise=Y, Code_JEDEC=MO-153-ACT, ComponentLink1Description="Datasheet URL", ComponentLink1URL=http://www.ti.com/general/docs/lit/getliterature.tsp?genericPartNumber=LM25116&fileType=pdf, CompType=Switcher, PackageDescription="Molded TSSOP, Jedec, 6.5 x 4.4 x 0.9mm Body, 20 Lead, 0.65mm Pitch, Exposed Pad", PackageReference=PWP0020A, PinCount=20, RoHS=Y
U3 U3.3_2 U3AS U5 U6 U7 U8 U9 U10 U11 U12 U13 U14 U15 U16 U17 U18 U20: library part CMP-0272-02192-3, "550 uA/Ch, 3 MHz, Rail-to-Rail Output Operational Amplifier, 2.7 to 16 V, -40 to 125 degC, 5-pin SOT23 (DBV5), Green (RoHS & no Sb/Br)", Manufacturer="Texas Instruments", Rating=Catalog, Total Supply Voltage(Max)(+5V is 5, +/-5V is 10)=16, Total Supply Voltage(Min)(+5V is 5, +/-5V is 10)=2.7, CMRR(Min)(dB)=69, Code_JEDEC=MO-178, ComponentLink1Description="Manufacturer URL", ComponentLink1URL=http://www.ti.com/, ComponentLink2Description=Datasheet, ComponentLink2URL=http://www.ti.com/lit/ds/symlink/tlv271.pdf, ComponentLink3Description="Package Specification", ComponentLink3URL=http://www.ti.com/litv/pdf/mpds018i, DatasheetVersion=SLOS351D, Eco-Plan="Green (RoHS & no Sb/Br)", GBW(Typ)(MHz)=3, IIB(Max)(pA)=60, Iq per channel(Max)(mA)=0.66, Mounting Technology="Surface Mount", Number Of Channels=1, Offset Drift(Typ)(uV/C)=2, PackageDescription="5-Pin Plastic Small Outline, Body 1.6 x 2.9 mm, Pitch 0.95 mm", PackageReference=DBV0005A, PackageVersion="4073253-4/K, 03/2006", Packing="LARGE T&R", PartNumber=TLV271IDBVR, Slew Rate(Typ)(V/us)=2.4, Sub Family="Low Supply Voltage Amplifier (<=2.7V), Precision Amplifier", Vio (25C)(Max)(mV)=5
UA: library part CMP-04903-000072-1, "IC GATE AND 1CH 2-INP SOT23-5", Case/Package=SOT-23-5, High Level Output Current=-32mA, Low Level Output Current=32mA, Max Operating Temperature=125°C, Max Supply Voltage=5.5V, Min Operating Temperature=-40°C, Min Supply Voltage=1.65V, Package Quantity=3000, Quiescent Current=10uA, Lead Free="Lead Free", Logic Function="AND GATE", Mount="Surface Mount", Number of Bits=1, Number of Circuits=1, Number of Elements=1, Number of Gates=1, Number of Input Lines=2, Number of Inputs=2, Number of Output Lines=1, Number of Outputs=1, Number of Pins=5, Output Current=32mA, Packaging="Tape and Reel", Propagation Delay=4ns, Radiation Hardening=No, REACH SVHC="No SVHC", RoHS Compliant=Yes, Series=74LVC, Technology=CMOS, Weight=0.000557oz
Um1: "No Description Available", Mfr_Name=STMicroelectronics, RefDes=RefDes, Type=Type
Y1: library part CMP-27762-010820-1, "Crystal 25MHz ±20ppm 18pF SMD-2 6mm x 3.5mm", Case/Package=CSMD, ESR (Equivalent Series Resistance)=50R, Frequency=25MHz, Frequency Stability=30ppm, Frequency Tolerance=20ppm, Load Capacitance=18pF, Max Operating Temperature=85°C, Min Operating Temperature=-40°C, Operating Frequency="25 MHz", Package Quantity=1000, Resistor Type=Ceramic, Depth=3.5mm, Height=0.055inch, Lead Free="Lead Free", Length=6mm, Mount="Surface Mount", Number of Pins=2, Packaging="Tape and Reel", Radiation Hardening=No, REACH SVHC=Yes, Series=ABM7, Series Resistance=50R, Termination=SMD/SMT, Tolerance=20ppm, Width=3.3mm
Y2: library part CMP-00536-143767433-1, "MU00525-32.768K Crystal 32.7680KHZ 6PF SMD", NexarPartId=143767433

## Via types
v1: diameter 23.62, hole 11.81, Top Layer to Bottom Layer, 370 vias
v2: diameter 19.68, hole 7.87, Top Layer to Bottom Layer, 84 vias
v3: diameter 15, hole 8, Top Layer to Bottom Layer, 35 vias

## Nets (pads, with @x,y where several pads share a name; then routed paths per layer and width w, separated by ;. In a path a pad name is that pad's centre, name@x,y a point inside that pad or via, vN(x,y) a via of type N, cw(c..) or ccw(c..) an arc to the next point about the centre after c; other vN are vias at no path point)
3.3+: C1.2 C2.2 C3.2 C4.2 C13.1 C29.1 C51.2 C52.1 Cb1.1 Cb2.1 Cb3.1 Cb4.1 Cb5.1 Cb6.1 Cb7.1 Cb8.1 Cb9.1 Cb11.1 Cb12.1 Cb13.1 Cb14.1 Cb16.1 Cb17.1 Cb18.1 Cb19.1 Cbx.1 Co_6.1 L6.2 Micro_H.1 Rf.2 RJ2.1 SW2.3 U3.3_2.5 U3.5@4166.34,379.92 U3AS.5 U5.5@4653.54,342.52 U6.5@4741.14,155.51 U6.10 U7.5@3776.57,194.88 U8.5 U9.1@3735.97,3851.18 U9.5@3731.3,395.67 U10.5 U11.5 U12.5 U13.5 U14.5 U15.5 U16.5 U17.5 U18.5 U20.5 UA.5 Um1.13 Um1.19 Um1.32 Um1.48 Um1.64 Usup.3 | length 24536.3
  Top Layer w6: v3(4159.45,4366.14) 4162.06,4368.75 4177.16,4368.75 4200.15,4391.74 4217.65,4391.74 Um1.64@4218.65,4392.74 4219.65,4393.74 4245.11,4393.74 4297.39,4446.02 4297.39,4718 ; Um1.48@4297.39,4766.76 4297.39,4718 ; v1(4316.93,3858.27) 4316.93,3832.68 4333.74,3815.87 4333.74,3813.9 C29.1@4336.61,3811.02 ; Um1.19@4671.41,4432.11 4670.41,4433.11 4637.31,4433.11 4626.56,4443.86 4626.56,4668.63 ; Um1.32@4671.41,4688.02 4670.41,4687.02 4644.95,4687.02 4626.56,4668.63 ; v3(4873.03,4841.83) 4873.03,4819.83 4880.99,4811.87 RJ2.1@4881.56,4811.87 ; 4297.39,4718 4346.77,4668.63 4626.56,4668.63
  Top Layer w10: U18.5@190.94,818.9 279.57,818.9 Cb3.1@282.48,815.98 282.48,859.25 315.94,892.72 v1(377.95,892.72) ; U17.5@398.62,655.51 489.19,655.51 Cb4.1@494.09,650.61 496.08,648.62 v1(569.88,648.62) ; U16.5@855.31,744.09 862.53,744.09 870.33,736.3 870.33,714.32 v1(875.98,708.66) 876.39,708.66 897.21,729.48 928.32,729.48 943.24,744.41 Cb1.1@943.24,749.19 ; U14.5@889.76,202.76 946.74,202.76 Cb5.1@979.72,169.78 ; Cb5.1@979.72,165 Cb5.1@979.72,169.78 ; U15.5@1004.92,574.8 1094.49,574.8 Cb2.1@1096.46,572.83 1096.46,653.54 v1(1124.02,681.1) ; v1(1112.2,370.08) 1112.2,334.33 1011.72,233.84 1011.72,201.78 Cb5.1@979.72,169.78 ; U20.5@1280.57,189.02 U20.5@1283.17,189.02 ; v1(1284.72,344) 1284.72,340.31 1290.96,334.07 1290.96,196.81 U20.5@1283.17,189.02 ; Cb6.1@1379.98,184.11 1375.08,189.02 U20.5@1283.17,189.02 ; v1(1706.69,2909.45) 1706.69,1984.15 1733.27,1957.58 v1(1733.27,1828.74) ; v1(1708.66,3846.46) 1763.78,3791.34 2050.58,3791.34 2056.44,3797.2 2056.44,3881.89 ; v1(1868.11,4877.95) 1868.11,4874.27 1861.51,4867.67 Rf.2@1861.51,4824.85 1927.18,4824.85 1931.04,4828.71 U6.10@1931.04,4836.37 ; U13.5@1893.7,278.54 1931.3,278.54 1965.03,312.27 1986.78,312.27 Cb7.1@1994.09,319.59 ; v1(1982.28,386.81) 1982.28,331.69 Cb7.1@1992.13,321.85 ; U3AS.5@2040.32,117.13 2126.97,117.13 Cb8.1@2135.83,125.98 2246.53,125.98 2265.23,144.69 v1(2265.75,144.69) ; v1(2056.44,3913.13) 2056.44,3881.89 ; L6.2@2154.44,3997.13 2128.63,3997.13 2115.91,3984.42 Co_6.1@2115.91,3930.13 ; v1(2529.53,350.39) 2529.53,346.71 2535.46,340.77 2535.46,293.23 2543.26,285.43 U12.5@2552.17,285.43 2665.35,285.43 Cb9.1@2671.26,279.53 ; U11.5@2657.48,133.86 2742.13,133.86 Cb11.1@2753.94,122.05 2761.81,129.92 v1(2840.55,129.92) ; U8.5@3209.65,403.54 U8.5@3210.71,403.54 ; v1(3218.5,468.5) 3218.5,411.34 U8.5@3210.71,403.54 ; U10.5@3293.31,210.63 3304.13,210.63 3325.79,232.28 3386.83,232.28 Cb13.1@3395.67,223.44 3404.51,232.28 v1(3458.66,232.28) ; Cb12.1@3297.57,398.14 3292.17,403.54 U8.5@3210.71,403.54 ; SW2.3@3314.56,4575 3344.09,4575 3416.97,4502.12 3416.97,3966.18 3427.07,3956.08 ; v1(3379.92,3929.13) 3406.87,3956.08 3427.07,3956.08 ; U9.5@3731.3,395.67 3812.03,395.67 Cb16.1@3820.87,386.83 ; v1@3731.3,465.8 3734.25,468.75 v1(3734.25,472.44) 3736.86,469.83 3742.65,469.83 Cb16.1@3814.42,398.06 ; U9.1@3735.97,3851.18 3678.68,3908.46 3599.41,3908.46 3563.01,3872.07 UA.5@3563.01,3836.61 3549.21,3836.61 3496.06,3889.76 3493.39,3889.76 ; U7.5@3776.57,194.88 3872.07,194.88 Cb17.1@3882.87,184.07 3882.87,188.86 3948.96,254.95 3948.96,458.77 3942.91,464.82 v1(3942.91,468.5) ; U3.5@4166.34,379.92 4166.34,444.15 v1@4171.26,449.07 ; v1(4171.26,452.76) v1@4171.26,449.07 ; U3.3_2.5@4190.94,200.79 4290.37,200.79 Cb19.1@4297.24,193.92 4349.43,193.92 4391.73,236.22 4391.73,429.13 v1(4411.42,448.82) ; Cb18.1@4253.94,381.89 4253.94,386.68 4239.01,401.6 4210.61,401.6 4171.26,440.94 v1@4171.26,449.07 ; C29.1@4336.61,3811.02 Usup.3@4516.41,3811.02 ; Um1.13@4533.61,4314 4533.61,4223.76 C13.1@4537.82,4219.55 ; C13.1@4537.82,4219.52 C13.1@4551.72,4205.66 4520.38,4205.66 4498.72,4184 4498.72,4137 4528.35,4107.36 4689.47,4107.36 4700.53,4096.3 4700.53,4067.19 Micro_H.1@4751.72,4016 ; C13.1@4551.72,4205.66 4609.2,4205.66 4621.06,4217.52 C52.1@4622.05,4217.52 4706.69,4217.52 C51.2@4708.66,4219.49 4769.69,4219.49 C4.2@4770.67,4220.47 4838.58,4220.47 C3.2@4840.55,4218.5 4842.52,4216.54 C2.2@4902.56,4216.54 4965.55,4216.54 C1.2@4966.54,4217.52 ; C13.1@4551.72,4213.5 4551.72,4247.12 4557.09,4252.49 v1(4557.09,4253.7) v1@4557.09,4254.92 ; v1(4631.89,456.69) 4659.45,429.13 4659.45,348.43 U5.5@4653.54,342.52 4736.26,342.52 Cb14.1@4750,328.78 ; U6.5@4741.14,155.51 4831.71,155.51 Cbx.1@4832.68,154.55 4832.68,213.83 4842.52,223.68 v1(4842.52,227.36) ; 2056.44,3881.89 2075.54,3881.89 Co_6.1@2107.28,3913.63 ; Co_6.1@2107.28,3913.63 2115.91,3922.26 Co_6.1@2115.91,3930.13 ; Co_6.1@2107.28,3913.63 2107.28,3782.48 2379.92,3509.84 2960.63,3509.84 3340.55,3889.76 3493.39,3889.76 ; Co_6.1@2107.28,3913.63 2107.28,3921.5 Co_6.1@2115.91,3930.13 ; 3427.07,3956.08 3493.39,3889.76
  Layer 1 w6: v1(3379.92,3929.13) 3379.69,3928.9 3379.69,3905.32 3458.24,3826.77 3659.45,3826.77 4159.45,4326.77 4159.45,4353.06 ; v3@4159.87,4366.14 v3(4159.45,4366.14) 4159.45,4353.06 ; v1@4557.09,4254.92 4511.59,4300.42 4511.59,4309.28 4467.81,4353.06 4159.45,4353.06
  Layer 1 w10: v1(1124.02,681.1) 1124.02,984.57 1713.58,1574.13 1713.58,1809.06 v1(1733.27,1828.74) ; v1(1284.72,344) 1598.91,344 1682.01,260.91 1913.31,260.91 1919.16,266.76 1919.16,267.51 1933.62,281.97 1961.11,281.97 1975.74,296.61 1975.74,387.84 1981.6,393.7 2016.73,393.7 v1(2265.75,144.69) ; v1(1706.69,2909.45) 1707.68,2910.43 1707.68,3845.47 v1(1708.66,3846.46)
  Bottom Layer w6: v1(4316.93,3858.27) 4316.93,3946.61 4584.65,4214.33 4584.65,4227.36 4557.09,4254.92 4666.34,4254.92 4884.72,4473.3 4884.72,4641.01 4873.03,4652.69 v3(4873.03,4841.83)
  Bottom Layer w10: v1(377.95,892.72) 569.88,700.79 v1(569.88,648.62) 673.23,751.97 702,751.97 745.3,708.66 v1(875.98,708.66) 903.54,681.1 v1(1124.02,681.1) 1284.72,520.4 v1(1284.72,344) 1258.64,370.08 v1(1112.2,370.08) ; v1(1868.11,4877.95) 1931.1,4814.96 1931.1,4038.47 v1(2056.44,3913.13) ; v1(2265.75,144.69) 2265.75,306.1 2310.04,350.39 v1(2529.53,350.39) 2797.24,350.39 2840.55,307.09 v1(2840.55,129.92) 3179.13,468.5 v1(3218.5,468.5) 3383.86,468.5 3458.66,393.7 v1(3458.66,232.28) 3935.29,232.28 3942.91,239.91 v1(3942.91,468.5) ; v1(3734.25,472.44) 3736.22,470.47 3940.94,470.47 v1(3942.91,468.5) ; v1(4842.52,227.36) 4845.13,229.97 4845.13,238.83 4883.86,277.56 4883.86,425.2 4852.36,456.69 v1(4631.89,456.69) 4628.2,456.69 4620.33,448.82 v1(4411.42,448.82) 4409.45,450.79 4173.23,450.79 v1(4171.26,452.76) 4167.57,452.76 4151.83,468.5 v1(3942.91,468.5)
3.3_Fuse: R34.1 U3.1@4050.2,379.92 U3.3_2.3 U3.4@4166.34,305.12 Um1.24 | length 5883.2
  Top Layer w6: Um1.24@4671.41,4530.54 4722.98,4530.54 4727.88,4535.43 v3(4730.31,4535.43) 4770.84,4535.43 R34.1@4775.27,4531
  Top Layer w10: U3.1@4050.2,379.92 4057.99,372.13 4057.99,376.89 4068.82,387.72 4088.82,387.72 4089.06,387.95 4104.33,387.95 ; U3.3_2.3@4074.8,125.98 4063.98,125.98 4050.43,139.53 3992.08,139.53 3986.22,145.39 3986.22,250.05 3992.08,255.91 4100.44,255.91 4106.3,261.76 4106.3,387.95 ; v1(4104.33,534.5) 4106.3,532.53 4106.3,389.02 4149.64,345.69 4149.64,312.91 4157.43,305.12 U3.4@4166.34,305.12
  Layer 1 w6: v3(4730.31,4535.43) 4730.76,4534.99 4746.81,4534.99 4758.78,4523.02 4772.4,4523.02 4776.94,4527.56 4856.3,4527.56 v1(4919.58,4464.27)
  Bottom Layer w6: v1(4104.33,534.5) 4100.96,531.12 4086.14,531.12 4080.52,525.51 3952.49,525.51 3948.98,529.02 3948.98,788.54 4260.28,1099.85 4570.32,1099.85 4598.43,1127.95 4598.43,4028.94 4554.09,4073.28 4554.09,4092.07 4567.38,4105.36 4596.88,4105.36 4600.39,4108.88 4600.39,4174.83 4657.12,4231.56 4725.66,4231.56 4919.29,4425.2 4919.29,4463.98 v1(4919.58,4464.27)
5.5_Fuse: R33.1 U7.3@3660.43,120.08 U9.1@3615.16,395.67 U9.4@3731.3,320.87 Um1.11 | length 5986.4
  Top Layer w6: Um1.11@4494.24,4314 4494.24,4279.18 4481.55,4266.49 4481.55,4131.16 4520.57,4092.15 4526.5,4092.15 4562.35,4056.29 4602.24,4056.29 R33.1@4612.2,4046.33 4644.16,4046.33 4647.83,4050 4648.8,4050 v1(4671.72,4050)
  Top Layer w10: U9.1@3615.16,395.67 3615.16,451.04 3675.93,511.81 v1(3735.24,511.81) ; U9.1@3621.17,400.49 3633.78,387.87 3698.53,323.12 3718.22,323.12 U9.4@3720.47,320.87 ; U7.3@3660.43,120.08 3649.61,120.08 3636.06,133.62 3633.35,133.62 3616.14,150.83 3616.14,241.27 3655.82,280.95 3680.56,280.95 U9.4@3720.47,320.87 ; U9.4@3731.3,320.87 U9.4@3720.47,320.87
  Layer 1 w6: v1(3735.24,511.81) 4152.65,511.81 4169.15,495.31 4616.25,495.31 4978.35,857.42 4978.35,1362.2 4812.32,1528.23 4812.32,2586.67 4920.38,2694.73 4920.38,2817.58 4853.3,2884.66 4853.3,3081.67 4844.34,3090.62 4844.34,3347.3 v1(4958.66,3461.61)
  Bottom Layer w6: v1(4671.72,4050) 4693.94,4027.77 4693.94,3965.5 4818.41,3841.04 4885.34,3841.04 4958.66,3767.72 v1(4958.66,3461.61)
12V_SUPPLY: Ct7.1 L1_7.1 Rf7.1 U7.10 U9.16 | length 3648.7
  Top Layer w10: Ct7.1@2310.04,5221.46 2316.93,5228.35 2367.13,5228.35 2419.44,5176.03 2419.44,4928 2428.15,4919.29 L1_7.1@2474.45,4919.29 2563.98,4919.29 2657.48,5012.8 2872.05,5012.8 2890.75,4994.09 2890.75,3959.65 ; Rf7.1@2822.55,3816.46 2737.98,3816.46 U7.10@2735.55,3818.89 2735.55,3837.59 2742.84,3844.89 2775.99,3844.89 2890.75,3959.65 ; v1(2889.76,3917.32) 2890.75,3918.31 2890.75,3959.65 ; U9.16@4001.97,3851.18 4021.53,3851.18 4029.53,3859.18 4029.53,3897.64 v1(4029.23,3897.93)
  Bottom Layer w10: v1(2889.76,3917.32) 2923.98,3917.32 2929.84,3911.46 2929.84,3831.98 2974.41,3787.4 3750,3787.4 3844.49,3881.89 4013.78,3881.89 4029.23,3897.35 v1(4029.23,3897.93)
+5: 5.5V_F.2 5_E.1 5_ECB.1 5_LG.1 "LCD DISPLAY I2C.1" R52.1 | length 7722.8
  Top Layer w10: 3391.73,5161.42 3450.79,5102.36 3450.79,3992.13 3511.96,3930.95 3809.65,3930.95 3811.65,3928.95 3921.47,3928.95 3923.47,3930.95 4082.83,3930.95 4096.46,3917.32 4096.46,3629.8 4072.83,3606.17 v1(4072.83,3350.39) ; R52.1@3528.54,367.19 3525.52,367.19 3482.28,410.43 3482.28,682.74 5_LG.1@3550.08,750.54 ; 5.5V_F.2@4009.65,1215.72 4155.51,1361.59 4155.51,1763.78 v1(4064.96,1854.33)
  Top Layer w34.65: 5_ECB.1@3307.68,748.94 5_ECB.1@3308.49,749.74 ; 5_LG.1@3550.08,750.54 3553.4,753.86 3553.4,783.72 3875.79,1106.1 5.5V_F.2@3875.79,1215.72 5.5V_F.2@4009.65,1215.72
  Bottom Layer w10: v1(4064.96,1854.33) 4064.96,1886.81 3982.28,1969.49 3982.28,2625.98 3918.31,2689.96 3918.31,3195.87 v1(4072.83,3350.39)
  Bottom Layer w34.65: 5_E.1@3064.68,748.94 3142.52,826.77 3340.55,826.77 3729.5,1215.72 5.5V_F.2@3859.06,1215.72 ; 5_ECB.1@3307.68,748.94 3309.32,750.57 3380.49,750.57 3833.82,1203.9 3863.96,1203.9 5.5V_F.2@3875.79,1215.72
AND_Output: R10.1 U9.2@3735.97,3801.18 U9.3@3735.97,3751.18 UA.4 Um1.40 | length 2331.4
  Top Layer w6: UA.4@3563.01,3761.81 3665.1,3761.81 ; v1(3643.7,3877.02) 3647.07,3873.64 3647.07,3779.84 3665.1,3761.81 ; U9.2@3704.47,3801.18 U9.2@3735.97,3801.18 U9.3@3735.97,3751.18 3704.47,3751.18 3693.84,3761.81 3665.1,3761.81 ; Um1.40@4454.87,4766.76 4454.87,4805.26 4457.87,4808.26 4457.87,4823.41 v3(4459.23,4824.76) ; v3(4679.13,4799.21) 4680.12,4799.21 4730.87,4849.96 4730.87,4895.17 R10.1@4731.3,4895.6
  Layer 1 w6: v3(3647.64,4322.83) 3647.64,4362.2 3867.25,4581.82 3875.12,4581.82 v3(4112.2,4818.9)